# Altium PCB HEADBAND-PCB.PcbDoc
Units mil, origin at the board's own origin, x right, y up, seen from the top; angles counter-clockwise.
Board outline 2030 x 1240 mil, 2 copper layers (Top Layer, Bottom Layer); 69 components, 57 nets, 217 pads, 108 vias.
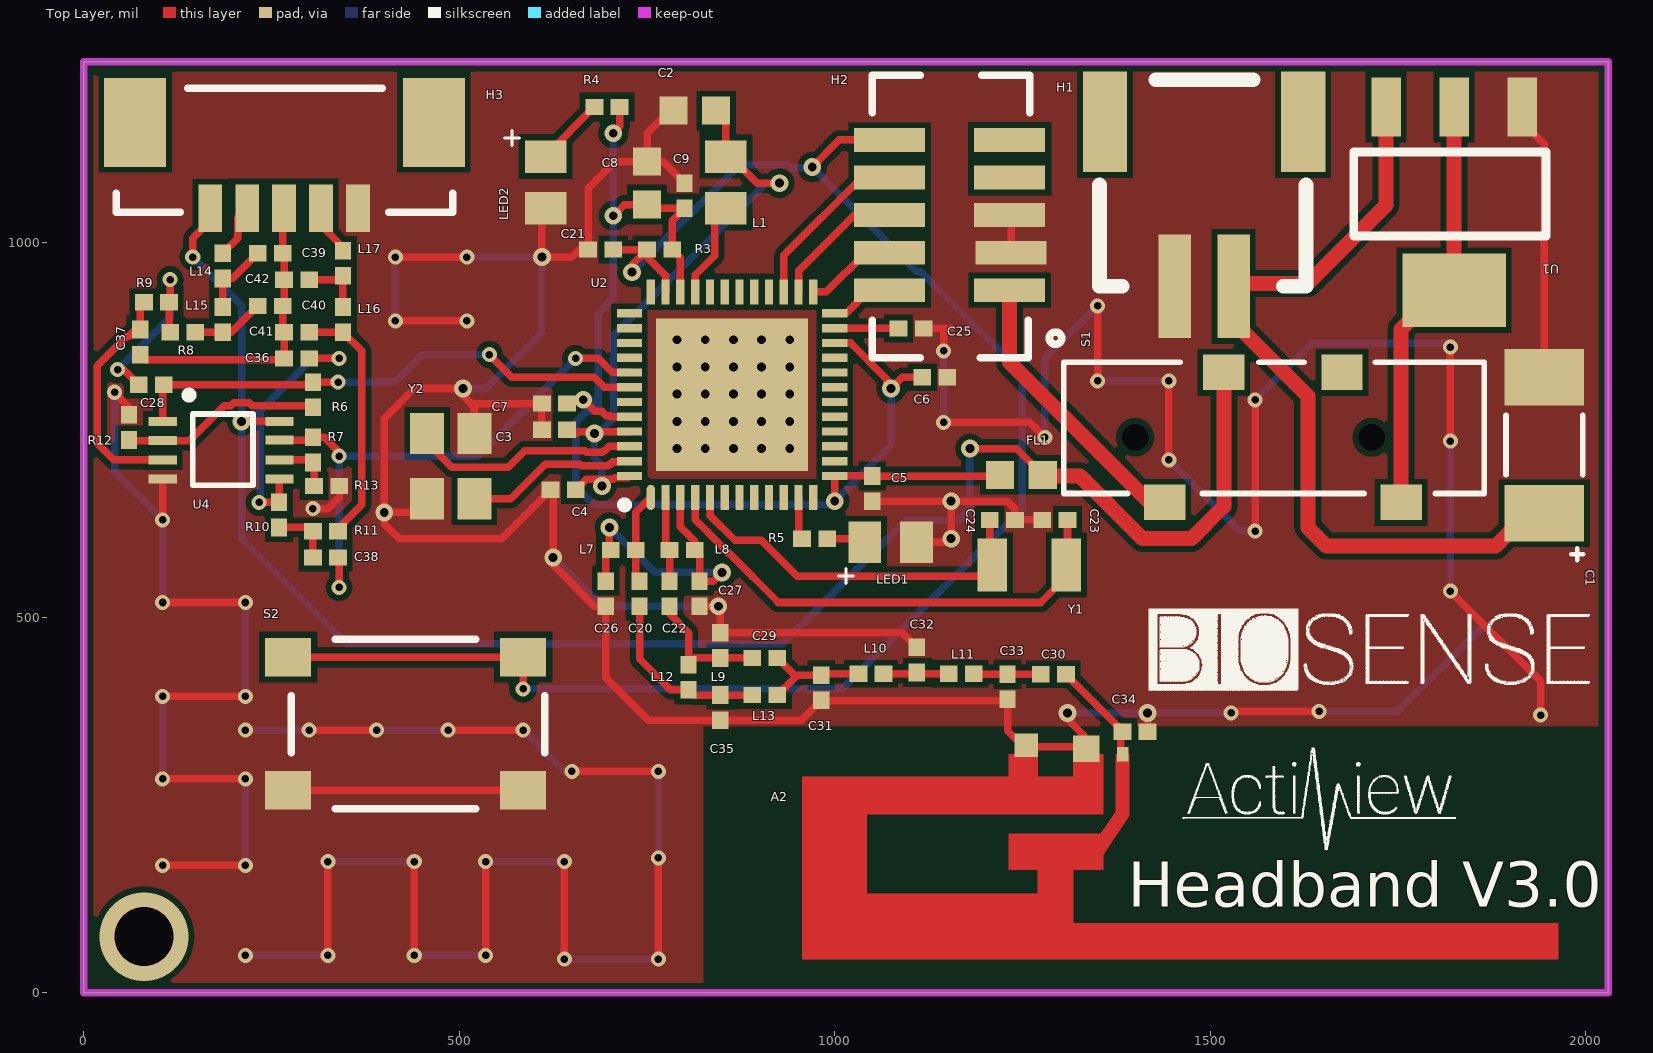
[diagram p0: Top Layer view]
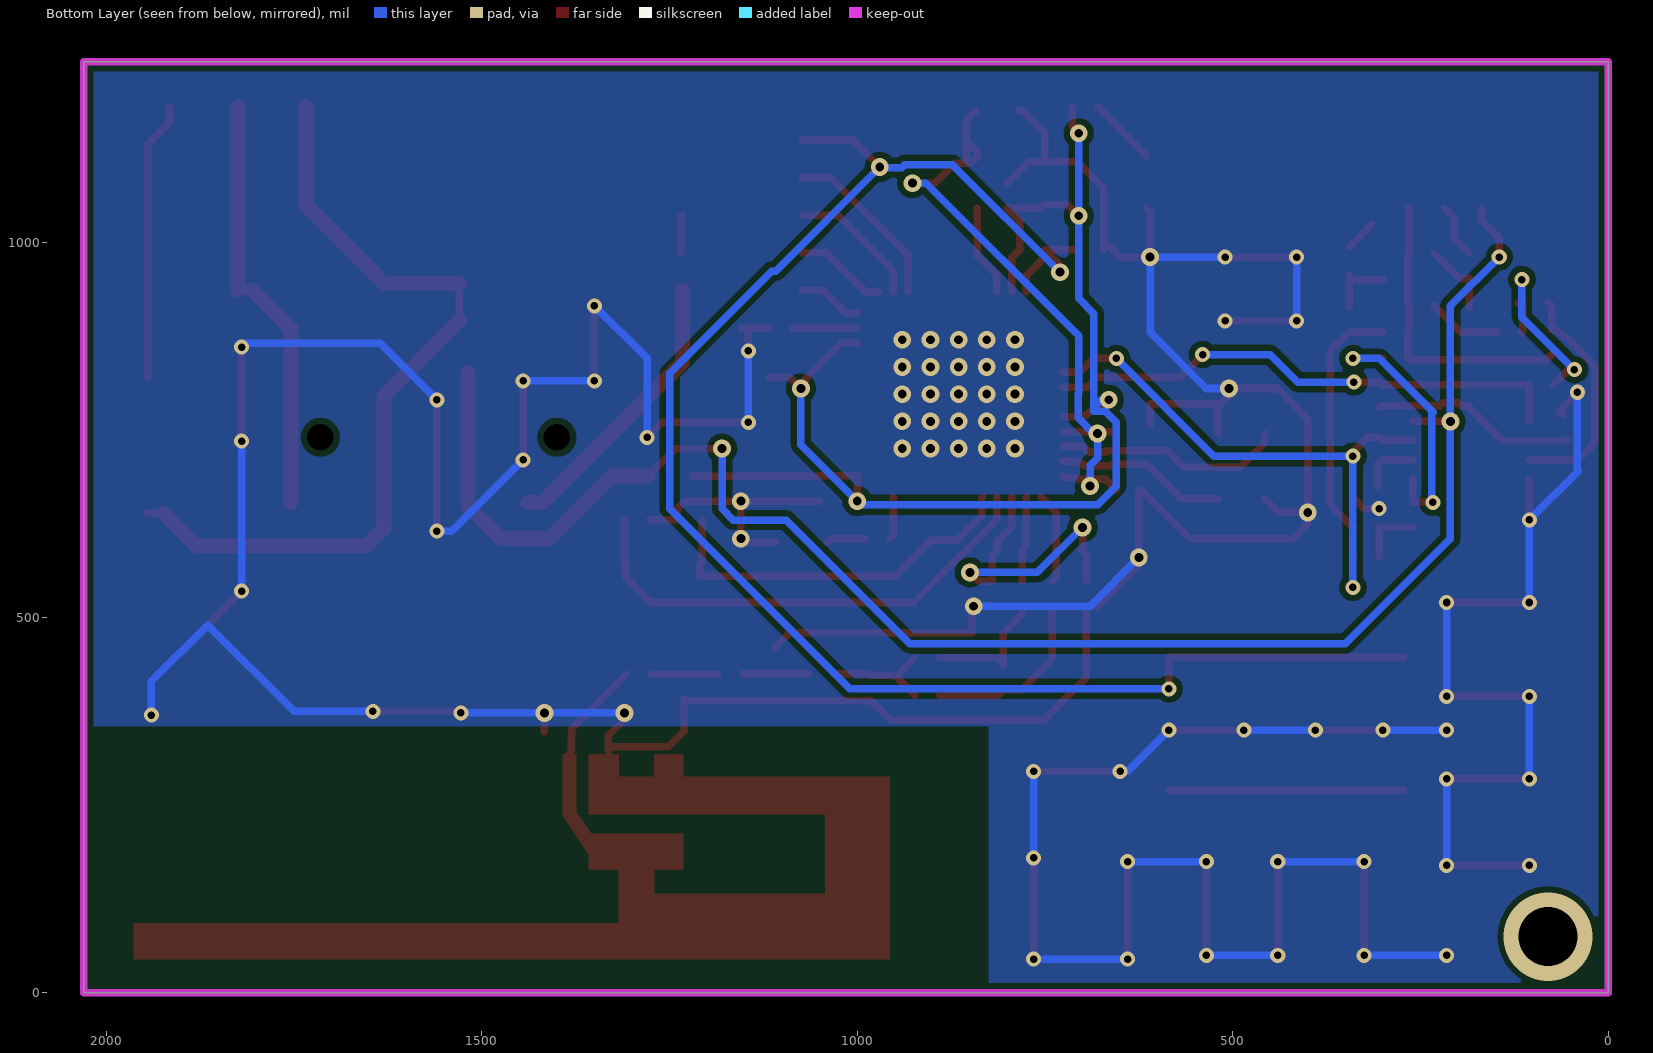
[diagram p1: Bottom Layer view, seen from below]

## Layer stack, top to bottom
Top Solder: solder mask 0.4, Solder Resist, Dk 3.5
Top Layer: signal copper 1.4
Dielectric 1: dielectric 12.6, FR-4, Dk 4.8
Bottom Layer: signal copper 1.4
Bottom Solder: solder mask 0.4, Solder Resist, Dk 3.5

## Board outline
0,0 2030,0 2030,1240 0,1240

## Design rules (kind name [scope] priority, off if disabled: settings)
Clearance [All] p1: gap=8 ignorepadtopadclearanceinfootprint=TRUE
ComponentClearance [All] p1: gap=0 collisioncheckmode=3 verticalgap=0 showdistances=FALSE
HoleSize [All] p1: absolutevalues=TRUE maxlimit=787.4 minlimit=7.87 maxpercent=80.000 minpercent=20.000
MinimumAnnularRing [All] p1: minimumring=5
MinimumSolderMaskSliver [All] p1: minsoldermaskwidth=0.79
PolygonConnect [All] p1: connectstyle=Direct reliefconductorwidth=10 reliefentries=4 polygonreliefangle="90 Angle" airgapwidth=10
RoutingVias [All] p1: holewidth=10 width=20 viastyle="Through Hole" minholewidth=5 minwidth=20 maxholewidth=196.85 maxwidth=196.85
SilkToSolderMaskClearance [IsPad] p1: minsilkscreentomaskgap=1.97 clearancetoexposedcopper=TRUE
SolderMaskExpansion [All] p1: expansion=4
Width [All] p1: maxlimit=40 minlimit=10 preferedwidth=10 minimp=50.000000 maximp=50.000000 favimp=50.000000
26 further rules are at their usual default settings.

## Classes and differential pairs
component class S1: C1 C2 C3 C4 C5 C6 C7 C8 C9 C20 C21 C22 C23 C24 C25 C26 C27 C29 C30 C31 C32 C33 C34 C35 FL1 H1 L1 L7 L8 L9 L10 L11 L12 L13 LED1 LED2 R3 R4 R5 S2 U1 U2 Y1 Y2
component class S2: C28 C36 C37 C38 C39 C40 C41 C42 H3 L14 L15 L16 L17 R6 R7 R8 R9 R10 R11 R12 R13 U4

## Components (designator, comment, footprint, x,y, rotation, side; value= is the part's Value field where it differs from the comment)
A2 "ANTENNA_DN007" Inverted_F_Antenna 1350,110 r0 top
C1 "150uF" "2312 [IMP] Polar" 1945,820 r270 top
C2 "22uF" 0603[IMP] 842.09,1175 r180 top
C3 "100nF" 0402[IMP] 643.46,750 r180 top
C4 "100nF" 0402[IMP] 655,670 r180 top
C5 "100nF" 0402[IMP] 1050,688.46 r270 top
C6 "100nF" 0402[IMP] 1116.54,820 r0 top
C7 "100nF" 0402[IMP] 643.46,785 r180 top
C8 "22uF" 0603[IMP] 750,1050 r90 top
C9 "100nF" 0402[IMP] 800,1045 r90 top
C20 "12pF" 0402[IMP] 740,548.46 r270 top
C21 "100nF" 0402[IMP] 705,990 r180 top
C22 "12pF" 0402[IMP] 780,548.46 r270 top
C23 "12pF" 0402[IMP] 1310,630 r180 top
C24 "12pF" 0402[IMP] 1206.54,630 r0 top
C25 "1uF" 0402[IMP] 1085,885 r0 top
C26 "12pF" 0402[IMP] 695,548.46 r270 top
C27 "12pF" 0402[IMP] 820,548.46 r270 top
C28 "10nF" 0402[IMP] 106.54,810 r180 top
C29 "1pF" 0402[IMP] 890.11,446.21 r0 top
C30 "12pF" 0402[IMP] 1274.43,424.44 r0 top
C31 "DNI" 0402[IMP] 982.04,389.64 r90 top
C32 "3.6pF" 0402[IMP] 1109.32,426.89 r90 top
C33 "1pF" 0402[IMP] 1230.11,390.97 r90 top
C34 "1pF" 0402[IMP] 1416.69,347.87 r180 top
C35 "1pF" 0402[IMP] 847.69,396.72 r270 top
C36 "10nF" 0402[IMP] 300,845 r180 top
C37 "10nF" 0402[IMP] 75,883.46 r270 top
C38 "10nF" 0402[IMP] 338.46,580 r180 top
C39 "Cap" 0402[IMP] 265,985 r180 top value=DNI
C40 "Cap" 0402[IMP] 265,915 r180 top value=DNI
C41 "Cap" 0402[IMP] 266.54,880 r0 top value=DNI
C42 "Cap" 0402[IMP] 266.54,950 r0 top value=DNI
FL1 "BLM18HE152SN1" 0603[IMP] 1277.09,690 r180 top
H1 "Battery Header" S2B-PH-SM4-TB 1452.52,941.1 r0 top
H2 "JTAG" HDR-2*5-0.05_Without_Through_Hole 1160,1030 r270 top
H3 "Header 5" "Header 5  -MolexPicoBlade - RightAngle" 168.15,1045 r0 top
L1 "6.8uH" 0805[IMP] 855,1045 r90 top
L7 "10nH" 0402[IMP] 701.54,590 r0 top
L8 "10nH" 0402[IMP] 813.46,590 r180 top
L9 "2.2nH" 0402[IMP] 847.69,446.21 r90 top
L10 "1.5nH" 0402[IMP] 1031.54,425 r0 top
L11 "2.2nH" 0402[IMP] 1151.74,425 r0 top
L12 "DNI" 0402[IMP] 805.26,403.79 r90 top
L13 "2.2nH" 0402[IMP] 890.11,396.72 r0 top
L14 "Inductor" 0402[IMP] 185,985 r270 top value=DNI
L15 "Inductor" 0402[IMP] 185,913.46 r270 top value=DNI
L16 "Inductor" 0402[IMP] 345,880 r90 top value=DNI
L17 "Inductor" 0402[IMP] 345,955 r90 top value=DNI
LED1 "LEDG" "0805[IMP] - POLAR" 1040,600 r0 top value=?
LED2 "LEDR" "0805[IMP] - POLAR" 615,1113.9 r270 top value=?
R3 "100k" 0402[IMP] 750,990 r0 top
R4 "330" 0402[IMP] 680,1180 r0 top
R5 "330" 0402[IMP] 990,605 r180 top
R6 "25k" 0402[IMP] 305,780 r90 top
R7 "25k" 0402[IMP] 305,706.54 r90 top
R8 "300k" 0402[IMP] 148.46,880 r180 top
R9 "300k" 0402[IMP] 113.46,920 r180 top
R10 "300k" 0402[IMP] 260,620 r90 top
R11 "300k" 0402[IMP] 338.46,615 r180 top
R12 "1k" 0402[IMP] 60,770 r270 top
R13 "1k" 0402[IMP] 340,675 r180 top
S1 "SW-SP3T" CL-SB-13B 1715,740 r180 top
S2 "SW_TACT" PTS645SH50SMTR92_LFS 585,270 r180 top
U1 "1117-3.3" SOT-223 1915.55,1180 r180 top
U2 "IC_RF_CC13XX_7X7_QFN48_V2" "RGZ(S-PVQFN-N48) - duplicate" 755,660 r90 top
U4 "AD8629" MSOP-8 105,761.18 r270 top
Y1 "32.768kHz" FC-135 1308.43,570 r180 top
Y2 "24MHz" TSX-3225 520,658.39 r90 top

## Footprints (in the part's own frame and the unit in brackets; to place one, negate y for a bottom-side part, rotate by r counter-clockwise, add the part's x,y. Pads: shape width x height; smd on the part's side, far side on the other; paste and mask are expansions set on the pad)
0402[IMP] [mm]
  rect 0.6x0.55 smd: 1(0,0) 2(0.85,0)
0603[IMP] [mm]
  rect 0.95x0.95 smd: 1(0,0) 2(1.45,0)
0805[IMP] [mm]
  rect 1.1x1.4 smd: 1(0,0) 2(1.75,0)
"0805[IMP] - POLAR" [mm]
  rect 1.1x1.4 smd: 1(0,0) 2(1.75,0)
  silkscreen extent -0.89,-1.4 -0.38,-0.89
"2312 [IMP] Polar" [mm]
  rect 1.9x2.7 smd: 1(0,0) 2(4.6,0)
  silkscreen extent 1.3,-1.3 6.2,1.32
CL-SB-13B [mm] "Three pos switch"
  round 0.1 hole 0.9: 0(0,0) 0(8,0)
  rect 1.4x1.2 smd: 1(-1,2.2) 2(1,-2.2) 3(5,-2.2) 4(7,2.2)
  silkscreen extent -3.81,-2.54 10.41,1.91
FC-135 [mm]
  rect 1x1.8 smd: 1(0,0) 2(2.5,0)
HDR-2*5-0.05_Without_Through_Hole [mm]
  rect 0.8x2.4 smd: 1(2.388,1.854) 2(2.388,-2.21) 3(1.118,1.905) 4(1.118,-2.21) 5(-0.152,1.854) 6(-0.152,-2.21) 7(-1.422,1.854) 8(-1.422,-2.21) 9(-2.692,1.854) 10(-2.692,-2.21)
  silkscreen extent -4.88,-2.79 4.67,3.61
"Header 5  -MolexPicoBlade - RightAngle" [mm]
  rect 2.1x3 smd: 0(-2.54,2.9) 0(7.569,2.9)
  rect 0.8x1.6 smd: 1(0,0) 2(1.25,0) 3(2.5,0) 4(3.75,0) 5(5,0)
  silkscreen extent -3.17,-0.13 8.2,4.06
Inverted_F_Antenna [mil]
  rect 15.75x19.68 smd: 1(33.5,208)
  rect 35.43x35.43 smd: 2(-15,215)
  rect 31.5x31.5 smd: 3(-95,220)
  Top Layer region: -393.5,178 -393.5,-65 613.5,-65 613.5,-17 -32.5,-17 -32.5,54 7.5,54 7.5,74 42.5,126 42.5,208 24.5,208 24.5,131 4.5,102 -118.5,102 -118.5,54 -79.5,54 -79.5,22 -307.5,22 -307.5,128 7.5,128 7.5,208 -32.5,208 -32.5,178 -79.5,178 -79.5,208 -118.5,208 -118.5,178 -393.5,178
MSOP-8 [mm]
  rect 0.3x0.95 smd: 1(0,0) 2(0.65,0) 3(1.3,0) 4(1.95,0) 5(1.95,3.95) 6(1.3,3.95) 7(0.635,3.95) 8(0,3.95)
  silkscreen extent -1.02,0.76 2.16,3.05
PTS645SH50SMTR92_LFS [mm] "Tactile switch"
  rect 1.55x1.3 smd: 1(0,0) 1(7.95,0) 2(0,-4.5) 2(7.95,-4.5)
  silkscreen extent -0.74,-5.11 7.85,0.64
"RGZ(S-PVQFN-N48) - duplicate" [mm]
  oval 0.85x0.28 smd mask+0.07: 1(0,0)
  rect 0.85x0.28 smd mask+0.07: 2(0,-0.5) 3(0,-1) 4(0,-1.5) 5(0,-2) 6(0,-2.5) 7(0,-3) 8(0,-3.5) 9(0,-4) 10(0,-4.5) 11(0,-5) 12(0,-5.5) 25(6.95,-5.5) 26(6.95,-5) 27(6.95,-4.5) 28(6.95,-4) 29(6.95,-3.5) 30(6.95,-3) 31(6.95,-2.5) 32(6.95,-2) 33(6.95,-1.5) 34(6.95,-1) 35(6.95,-0.5) 36(6.95,0)
  rect 0.28x0.85 smd mask+0.07: 13(0.725,-6.225) 14(1.225,-6.225) 15(1.725,-6.225) 16(2.225,-6.225) 17(2.725,-6.225) 18(3.225,-6.225) 19(3.725,-6.225) 20(4.225,-6.225) 21(4.725,-6.225) 22(5.225,-6.225) 23(5.725,-6.225) 24(6.225,-6.225) 37(6.225,0.725) 38(5.725,0.725) 39(5.225,0.725) 40(4.725,0.725) 41(4.225,0.725) 42(3.725,0.725) 43(3.225,0.725) 44(2.725,0.725) 45(2.225,0.725) 46(1.725,0.725) 47(1.225,0.725) 48(0.725,0.725)
  rect 5.15x5.15 smd mask+0.07: 49(3.475,-2.75)
  silkscreen extent -0.38,0.76 -0.13,1.02
S2B-PH-SM4-TB [mm] "S2B-PH-SM$-TB"
  rect 1.5x3.4 smd: 0(-2.35,5.56) 0(4.35,5.56)
  rect 1.1x3.5 smd: 1(2,0) 2(0,0)
  silkscreen extent -2.54,0 4.44,6.98
SOT-223 [mm]
  rect 1x2 smd: 1(0,0) 2(2.3,0) 3(4.6,0)
  rect 3.5x2.5 smd: 2(2.3,6.2)
  silkscreen extent -0.8,1.52 5.7,4.37
TSX-3225 [mm]
  rect 1.4x1.15 smd: 1(0,0) 2(2.2,0) 3(2.2,1.6) 4(0,1.6)

## Part data
C1: library part Cap_E, "Capacitor", Supplier Part Number 1=478-3481-1-ND, Supplier 1=Digi-Key
C2 C8: library part CAPACITOR, Current=CIMAX, MAX_TEMP=CTMAX, PSpiceTemplate="C^@REFDES %1 %2 ?TOLERANCE|C^@REFDES| @VALUE ?IC/IC=@IC/ TC=@TC1,@TC2 ?TOLERANCE|\n.model C^@REFDES CAP C=1 DEV=@TOLERANCE%|", Supplier Part Number 1=490-7611-1-ND, VOLTAGE=CMAX, CLASS=DISCRETE, DIST=FLAT, KNEE=CBMAX, SLOPE=CSMAX, Supplier 1=Digi-Key, TC1=0, TC2=0
C3 C4 C5 C6 C7 C9 C21: library part CAPACITOR, Current=CIMAX, MAX_TEMP=CTMAX, PSpiceTemplate="C^@REFDES %1 %2 ?TOLERANCE|C^@REFDES| @VALUE ?IC/IC=@IC/ TC=@TC1,@TC2 ?TOLERANCE|\n.model C^@REFDES CAP C=1 DEV=@TOLERANCE%|", Supplier Part Number 1=490-6327-1-ND, VOLTAGE=CMAX, CLASS=DISCRETE, DIST=FLAT, KNEE=CBMAX, SLOPE=CSMAX, Supplier 1=Digi-Key, TC1=0, TC2=0
C20 C22 C23 C24 C26 C27: library part CAPACITOR, Current=CIMAX, MAX_TEMP=CTMAX, PSpiceTemplate="C^@REFDES %1 %2 ?TOLERANCE|C^@REFDES| @VALUE ?IC/IC=@IC/ TC=@TC1,@TC2 ?TOLERANCE|\n.model C^@REFDES CAP C=1 DEV=@TOLERANCE%|", Supplier Part Number 1=399-1013-1-ND, VOLTAGE=CMAX, CLASS=DISCRETE, DIST=FLAT, KNEE=CBMAX, SLOPE=CSMAX, Supplier 1=Digi-Key, TC1=0, TC2=0
C25: library part CAPACITOR, Current=CIMAX, MAX_TEMP=CTMAX, PSpiceTemplate="C^@REFDES %1 %2 ?TOLERANCE|C^@REFDES| @VALUE ?IC/IC=@IC/ TC=@TC1,@TC2 ?TOLERANCE|\n.model C^@REFDES CAP C=1 DEV=@TOLERANCE%|", Supplier Part Number 1=1276-1448-1-ND, VOLTAGE=CMAX, CLASS=DISCRETE, DIST=FLAT, KNEE=CBMAX, SLOPE=CSMAX, Supplier 1=Digi-Key, TC1=0, TC2=0
C28 C31 C37: library part CAPACITOR, Current=CIMAX, MAX_TEMP=CTMAX, PSpiceTemplate="C^@REFDES %1 %2 ?TOLERANCE|C^@REFDES| @VALUE ?IC/IC=@IC/ TC=@TC1,@TC2 ?TOLERANCE|\n.model C^@REFDES CAP C=1 DEV=@TOLERANCE%|", VOLTAGE=CMAX, CLASS=DISCRETE, DIST=FLAT, KNEE=CBMAX, SLOPE=CSMAX, TC1=0, TC2=0
C29 C33 C34 C35: library part CAPACITOR, Current=CIMAX, MAX_TEMP=CTMAX, PSpiceTemplate="C^@REFDES %1 %2 ?TOLERANCE|C^@REFDES| @VALUE ?IC/IC=@IC/ TC=@TC1,@TC2 ?TOLERANCE|\n.model C^@REFDES CAP C=1 DEV=@TOLERANCE%|", Supplier Part Number 1=490-3199-1-ND, VOLTAGE=CMAX, CLASS=DISCRETE, DIST=FLAT, KNEE=CBMAX, SLOPE=CSMAX, Supplier 1=Digi-Key, TC1=0, TC2=0
C30: library part CAPACITOR, Current=CIMAX, MAX_TEMP=CTMAX, PSpiceTemplate="C^@REFDES %1 %2 ?TOLERANCE|C^@REFDES| @VALUE ?IC/IC=@IC/ TC=@TC1,@TC2 ?TOLERANCE|\n.model C^@REFDES CAP C=1 DEV=@TOLERANCE%|", Supplier Part Number 1=490-5924-1-ND, VOLTAGE=CMAX, CLASS=DISCRETE, DIST=FLAT, KNEE=CBMAX, SLOPE=CSMAX, Supplier 1=Digi-Key, TC1=0, TC2=0
C32: library part CAPACITOR, Current=CIMAX, MAX_TEMP=CTMAX, PSpiceTemplate="C^@REFDES %1 %2 ?TOLERANCE|C^@REFDES| @VALUE ?IC/IC=@IC/ TC=@TC1,@TC2 ?TOLERANCE|\n.model C^@REFDES CAP C=1 DEV=@TOLERANCE%|", Supplier Part Number 1=490-5939-1-ND, VOLTAGE=CMAX, CLASS=DISCRETE, DIST=FLAT, KNEE=CBMAX, SLOPE=CSMAX, Supplier 1=Digi-Key, TC1=0, TC2=0
C36 C38: library part CAPACITOR, Current=CIMAX, MAX_TEMP=CTMAX, PSpiceTemplate="C^@REFDES %1 %2 ?TOLERANCE|C^@REFDES| @VALUE ?IC/IC=@IC/ TC=@TC1,@TC2 ?TOLERANCE|\n.model C^@REFDES CAP C=1 DEV=@TOLERANCE%|", Supplier Part Number 1=478-10127-1-ND, VOLTAGE=CMAX, CLASS=DISCRETE, DIST=FLAT, KNEE=CBMAX, SLOPE=CSMAX, Supplier 1=Digi-Key, TC1=0, TC2=0
C39 C40 C41 C42: "Capacitor", LatestRevisionDate=17-Jul-2002, LatestRevisionNote="Re-released for DXP Platform.", PackageDescription="Radial Cap, Thru-Hole; 2 Leads; 0.3 in Pin Spacing", PackageReference=RAD-0.3, Published=8-Jun-2000, Publisher="Altium Limited"
FL1: library part INDUCTOR, Current=LMAX, DIELECTRIC=DSMAX, PSpiceTemplate="L^@REFDES %1 %2 ?TOLERANCE|L^@REFDES| @VALUE ?IC/IC=@IC/ ?TOLERANCE|\n.model l^@REFDES IND L=1 DEV=@TOLERANCE%|", Supplier Part Number 1=490-5216-1-ND, DIST=FLAT, Supplier 1=Digi-Key
H1: library part "Header 2", Supplier Part Number 1=455-1749-1-ND, Supplier 1=Digi-Key
H2: library part JTAG-ARM, "USB JTAG Programmer", Supplier Part Number 1=SAM13160CT-ND, Supplier 1=Digi-Key
H3: Supplier Part Number 1=WM7623CT-ND, Supplier 1=Digi-Key
L1: library part INDUCTOR, Current=LMAX, DIELECTRIC=DSMAX, PSpiceTemplate="L^@REFDES %1 %2 ?TOLERANCE|L^@REFDES| @VALUE ?IC/IC=@IC/ ?TOLERANCE|\n.model l^@REFDES IND L=1 DEV=@TOLERANCE%|", Supplier Part Number 1=445-6761-1-ND, DIST=FLAT, Supplier 1=Digi-Key
L7 L8: library part INDUCTOR, Current=LMAX, DIELECTRIC=DSMAX, PSpiceTemplate="L^@REFDES %1 %2 ?TOLERANCE|L^@REFDES| @VALUE ?IC/IC=@IC/ ?TOLERANCE|\n.model l^@REFDES IND L=1 DEV=@TOLERANCE%|", Supplier Part Number 1=712-1407-1-ND, DIST=FLAT, Supplier 1=Digi-Key
L9 L11 L13: library part INDUCTOR, Current=LMAX, DIELECTRIC=DSMAX, PSpiceTemplate="L^@REFDES %1 %2 ?TOLERANCE|L^@REFDES| @VALUE ?IC/IC=@IC/ ?TOLERANCE|\n.model l^@REFDES IND L=1 DEV=@TOLERANCE%|", Supplier Part Number 1=490-6794-1-ND, DIST=FLAT, Supplier 1=Digi-Key
L10: library part INDUCTOR, Current=LMAX, DIELECTRIC=DSMAX, PSpiceTemplate="L^@REFDES %1 %2 ?TOLERANCE|L^@REFDES| @VALUE ?IC/IC=@IC/ ?TOLERANCE|\n.model l^@REFDES IND L=1 DEV=@TOLERANCE%|", Supplier Part Number 1=490-6783-1-ND, DIST=FLAT, Supplier 1=Digi-Key
L12: library part INDUCTOR, Current=LMAX, DIELECTRIC=DSMAX, PSpiceTemplate="L^@REFDES %1 %2 ?TOLERANCE|L^@REFDES| @VALUE ?IC/IC=@IC/ ?TOLERANCE|\n.model l^@REFDES IND L=1 DEV=@TOLERANCE%|", DIST=FLAT
LED1: library part LED_G, "LED", Supplier 1=Digi-Key, Supplier 2=Digi-Key, Supplier Part Number 2=475-1410-1-ND
LED2: library part LED_R, "LED", Supplier Part Number 1=475-1278-1-ND, Supplier 1=Digi-Key
R3: library part RESISTOR, Supplier Part Number 1=541-100KYACT-ND, Supplier 1=Digi-Key
R4 R5: library part RESISTOR, Supplier Part Number 1=P330LCT-ND, Supplier 1=Digi-Key
R6 R7 R10 R11 R12 R13: library part RESISTOR
R8: library part RESISTOR, Supplier Part Number 1=311-180JRCT-ND, Supplier 1=Digi-Key
R9: library part RESISTOR, Supplier Part Number 1=541-5.23MLCT-ND, Supplier 1=Digi-Key
S2: "Tactile switch", Supplier Part Number 1=CKN9085CT-ND, Supplier 1=Digi-Key
U1: library part 1117-3.3V, "3.3V Voltage Regulator", Supplier Part Number 1=LM1117IMPX-3.3/NOPBCT-ND, Supplier 1=Digi-Key
U2: Supplier Part Number 1=296-44716-1-ND, Design_Date=2014-09-04, Designed_By="Artur Bielinski", SPLIT_INST=TRUE, Supplier 1=Digi-Key, SWAP_INFO=(S1+S2)
U4: Supplier Part Number 1=AD8629ARMZ-ND, Supplier 1=Digi-Key
Y1: library part CRYSTAL, Supplier Part Number 1=SER4089CT-ND, Supplier 1=Digi-Key
Y2: library part XTAL_4PIN_S, Supplier Part Number 1=SER3635CT-ND, Supplier 1=Digi-Key
A2: Design date=2011-09-19, Designed by="Artur Bielinski"
L14 L15 L16 L17: Code_IEC=1005, Code_JEITA=0402, LatestRevisionDate=29-May-2009, LatestRevisionNote="IPC-7351 Footprint Added.", PackageDescription="Chip Inductor", PackageReference=0402-A, Published=8-Jun-2000, Publisher="Altium Limited"

## Via types
v1: diameter 20, hole 10, Top Layer to Bottom Layer, 59 vias
v2: diameter 23.62, hole 11.81, Top Layer to Bottom Layer, 48 vias
v3: diameter 118.11, hole 78.4, Top Layer to Bottom Layer, 1 vias

## Nets (pads, with @x,y where several pads share a name; then routed paths per layer and width w, separated by ;. In a path a pad name is that pad's centre, name@x,y a point inside that pad or via, vN(x,y) a via of type N, cw(c..) or ccw(c..) an arc to the next point about the centre after c; other vN are vias at no path point)
CC1350_SW_PWR: U2.43
CC1350_VDD: FL1.1 H3.1 S1.3 U4.8 | length 2293.9
  Top Layer w10: v1(145,980) 145,1005 168.15,1028.15 H3.1 ; v2(210,761.18) U4.8 ; v2(1180,725) 1242.09,725 FL1.1 FL1.1@1278.62,688.46
  Top Layer w20: FL1.1@1278.62,688.46 1326.54,688.46 1410,605 1475.12,605 1518.15,648.03 S1.3
  Bottom Layer w10: v1(145,980) 210,915 v2(210,761.18) 210,605 350,465 930,465 1094.81,629.81 1164.9,629.81 1180,644.91 v2(1180,725)
DCDC_SW: L1.1 U2.33 | length 122.1
  Top Layer w10: U2.33 814.06,956.18 840,982.13 L1.1@840,1045
ElectrodeA: H3.2 L14.1 | length 73.4
  Top Layer w10: L14.1 205,1005 205,1032.64 H3.2
ElectrodeB: H3.4 L17.2 | length 42.9
  Top Layer w10: H3.4@314.64,1023.83 L17.2@345,993.46
ElectrodeGND: C36.2 C37.2 C39.1 C40.1 C41.1 C42.1 H3.3 | length 397.7
  Top Layer w10: C37.2 81.54,843.46 265,843.46 C36.2 C41.1 265,881.54 C40.1 266.54,916.54 C42.1 266.54,984.32 C39.1@265.43,985.43 ; C39.1 265,1043.43 H3.3
GND: A2.2 A2.3 C1.1 C2.2 C3.2 C4.2 C5.2 C6.2 C7.2 C8.2 C9.2 C21.2 C23.2 C24.2 C25.2 C26.2 C27.2 C31.1 C32.2 C33.1 C34.1 C35.2 H1.2 H2.3 H2.5 H3.5 L9.2 LED1.2 LED2.2 R12.1 R13.1 S2.1 U1.1 U2.49 U4.4 Y2.2 Y2.4 | length 10446.9
  Top Layer w10: v1(41,800) 41,799 65,775 R12.1 ; v1(105,170) v1(215,170) ; v1(105,285) v1(215,285) ; v1(105,395) v1(215,395) ; v1(105,520) v1(215,520) ; v1(105,630) U4.4 ; S2.1@272.01,270 S2.1@585,270 ; v1(300,350) v1(390,350) ; v1(305,645) 325,645 340,660 R13.1 ; v1(325,50) v1(325,175) ; v1(415,895) v1(510,895) ; v1(415,980) v1(510,980) ; v1(440,50) v1(440,175) ; Y2.4 438.62,640 v2(400,640) ; v1(485,350) v1(585,350) ; v2(505,805) v2@495.39,805 ; Y2.2 520,780 515,785 ; v1(535,50) v1(535,175) ; C3.2@610,756.54 C7.2 515,785 ; LED2.2 610,1040 v2(610,980) 650,980 665.77,995.77 C21.2 671.54,1071.54 707.09,1107.09 C8.2 ; v1(640,45) v1(640,175) ; v1(650,295) v1(765,295) ; v1(765,45) v1(765,180) ; C2.2 780,1175 750,1145 C8.2 ; C9.2 771.38,1107.09 C8.2 ; C27.2 v2(845,515) 847.69,512.31 L9.2 1089.99,479.68 C32.2 ; C31.1 955.64,363.25 C35.2 751.75,363.25 695,420 C26.2 680,515 625,570 v2(625,580) 625,666.54 C4.2 556.54,605 420,605 400,625 v2(400,640) ; C31.1@982.63,389.08 C33.1@1228.22,389.08 ; C5.2 v2(1155,655) ; LED1.2 1150,600 v2(1155,605) v2(1155,655) ; C25.2 1145,885 ; v1(1145,760) 1260,760 v1(1280,740) ; v1(1145,855) 1145,885 ; 1154.61,885 1145,885 ; C33.1 1230.11,349.44 A2.3@1251.69,327.87 ; H2.5 1235,1034 H2.3 ; A2.3@1257.13,327.87 1326.69,327.87 1331.69,322.87 1331.69,342.87 1310,364.56 v2(1310,372.87) ; C23.2 C24.2 1240,645 1230,655 v2(1155,655) ; v1(1350,815) v1(1350,915) ; C34.1 v2(1416.69,372.87) ; v1(1445,710) v1(1445,815) ; v1(1527.87,372.87) 1530,375 v1(1645,375) ; v1(1560,615) v1(1560,790) ; v1(1820,535) 1940,415 v1(1940,370) ; v1(1820,735) v1(1820,860) ; U1.1 1915.55,1159.45 1945,1130 C1.1 ; v2(400,640) 400,765 440,805 v2@495.39,805 ; v2@495.39,805 515,785.39 515,785
  Bottom Layer w10: v1(41,800) 41,696 40,695 v1(105,630) v1(105,520) ; v1(105,285) v1(105,395) ; v1(215,50) v1(325,50) ; v1(215,170) v1(215,285) ; v1(215,350) v1(300,350) ; v1(215,395) v1(215,520) ; v1(325,175) v1(440,175) ; v1(390,350) v1(485,350) ; v1(415,895) v1(415,980) ; v1(440,50) v1(535,50) ; v2(505,805) 535,805 610,880 v2(610,980) v1(510,980) ; v1(535,175) v1(640,175) ; v1(585,350) 640,295 v1(650,295) ; v2(625,580) 690,515 v2(845,515) ; v1(640,45) v1(765,45) ; v1(765,180) v1(765,295) ; v1(1145,760) v1(1145,855) ; v1(1280,740) 1280,845 v1(1350,915) ; v2(1310,372.87) v2(1416.69,372.87) v1(1527.87,372.87) ; v1(1350,815) v1(1445,815) ; v1(1445,710) 1540,615 v1(1560,615) ; v1(1560,790) 1635,865 1815,865 v1(1820,860) ; v1(1645,375) 1750,375 1865,490 1940,415 v1(1940,370) ; v1(1820,535) v1(1820,735)
  other v2: 790,725 827.5,725 865,725 902.5,725 940,725 790,761.25 827.5,761.25 865,761.25 902.5,761.25 940,761.25 790,797.5 827.5,797.5 865,797.5 902.5,797.5 940,797.5 790,833.75 827.5,833.75 865,833.75 902.5,833.75 940,833.75 790,870 827.5,870 865,870 902.5,870 940,870
JTAG_TCK: H2.4 U2.25 | length 123.2
  Top Layer w10: U2.25 988.62,933.62 1041,986 H2.4
JTAG_TDI: H2.8 U2.27 | length 232.4
  Top Layer w10: U2.27 932.16,982.16 1036,1086 H2.8
JTAG_TDO: H2.6 U2.26 | length 180.1
  Top Layer w10: U2.26 951.85,961.85 1026,1036 H2.6
JTAG_TMS: H2.2 U2.24 | length 85.7
  Top Layer w10: U2.24 1015.08,905.08 1046,936 H2.2
NetA1_1: 
NetA2_1: A2.1 C30.2 C34.2 | length 137.8
  Top Layer w10: C30.2 1380.19,352.14 1380.19,344.83 1380.63,344.4 1380.63,320.87 A2.1
NetC1_2: C1.2 H1.1 U1.3 | length 1088.2
  Top Layer w10: H1.1@1530,895 H1.1@1530,945 ; C1.2@1923.9,638.9 C1.2
  Top Layer w20: H1.1@1530,895 1630,795 1630,620 1655,595 1880,595 C1.2@1923.9,638.9 ; H1.1@1530,945 1630,945 1734.45,1049.45 U1.3
NetC10_2: 
NetC12_1: 
NetC12_2: 
NetC14_1: 
NetC15_1: 
NetC18_1: 
NetC20_1: C20.1 L7.2 U2.1 | length 121.9
  Top Layer w10: C20.1 735,553.46 L7.2 735,640 U2.1
NetC20_2: 
NetC21_1: C21.1 H2.10 R3.1 S2.2 U2.35 | length 2262.9
  Top Layer w10: S2.2@272.01,447.17 585,447.17 v1(585,405) ; C21.1 R3.1 ; v2(730,960) 730,970 R3.1 ; U2.35 774.69,955.32 750,980 R3.1 ; v2(970,1100) 1006,1136 H2.10
  Bottom Layer w10: v1(585,405) 1010,405 1250,645 1250,825.48 1114.04,961.44 1108.56,961.44 v2(970,1100) 969.28,1099.28 940.81,1099.28 936.81,1103.28 873.28,1103.28 v2(730,960)
NetC22_1: C22.1 L8.2 U2.2 | length 113.7
  Top Layer w10: U2.2 774.69,595.32 L8.2 C22.1
NetC22_2: 
NetC23_1: C23.1 U2.4 Y1.1 | length 660.4
  Top Layer w10: U2.4 814.06,630.49 830.66,613.88 830.66,613.83 838.28,606.21 838.33,606.21 859.73,584.81 860.28,584.81 925.09,520 1274.43,520 1308.43,553.99 Y1.1 1310,571.57 C23.1
NetC24_1: C24.1 U2.5 Y1.2 | length 510.3
  Top Layer w10: U2.5 834.01,659.73 834.01,636.53 833.74,636.26 867.19,602.81 902.19,602.81 950,555 1210,555 Y1.2 1206.54,573.46 C24.1
NetC25_1: C25.1 U2.23 | length 85.1
  Top Layer w10: U2.23 1000.47,885 C25.1
NetC26_1: C26.1 C27.1 L7.1 L8.1 U2.3 | length 406.7
  Top Layer w10: C26.1 695,583.46 L7.1 700,591.54 v2(700,620) ; U2.3 794.37,620.63 813.46,601.54 L8.1 820,583.46 C27.1 838.46,548.46 v2(850,560)
  Bottom Layer w10: v2(700,620) 760,560 v2(850,560)
NetC28_1: C28.1 R6.2 U2.42 U4.1 | length 703.9
  Top Layer w10: U4.1 105,808.46 C28.1 301.54,810 R6.2 v1(338.46,813.46) ; v1(540,850) 570,820 680,820 693.35,806.65 U2.42
  Bottom Layer w10: v1(338.46,813.46) 413.46,813.46 450,850 v1(540,850)
NetC28_2: C28.2 R8.2 R9.1 | length 259.6
  Top Layer w10: v1(45,830) 53.07,830 C28.2 ; R9.1 113.46,881.54 R8.2 ; v1(115,950) 115,923.46 R9.1@120,918.46
  Bottom Layer w10: v1(45,830) 115,900 v1(115,950)
NetC29_1: C22.2 C29.1 L9.1 L12.2 | length 176.8
  Top Layer w10: C22.2 780,505 805.26,479.74 L12.2 814.22,446.21 L9.1 C29.1
NetC29_2: C29.2 C31.2 L10.1 L13.2 | length 155.6
  Top Layer w10: L13.2 949.97,423.11 ; C29.2 946.68,423.11 949.97,423.11 ; L10.1 983.93,425 C31.2 949.97,423.11
NetC30_1: C30.1 C33.2 L11.2 | length 88.6
  Top Layer w10: L11.2@1185.8,424.44 C33.2 C30.1
NetC32_1: C32.1 L10.2 L11.1 | length 86.7
  Top Layer w10: L10.2 L11.1
NetC35_1: C20.2 C35.1 L12.1 L13.1 | length 240.1
  Top Layer w10: C20.2 740,445 781.21,403.79 L12.1 812.33,396.72 C35.1 L13.1
NetC36_1: C36.1 R10.2 U4.5 | length 355.2
  Top Layer w10: v1(233.46,653.46) R10.2 260,683.9 U4.5 ; C36.1 v1(340,845)
  Bottom Layer w10: v1(233.46,653.46) 234.81,654.81 234.81,771.46 233.13,773.13 305,845 v1(340,845)
NetC37_1: C37.1 R9.2 U4.3 | length 315.1
  Top Layer w10: R9.2 75,915 C37.1 68.46,883.46 59.81,874.81 57.28,874.81 18,835.53 18,732 40,710 U4.3
NetC38_1: C38.1 R7.2 U2.41 U4.7 | length 758
  Top Layer w10: U4.7 301.18,736.18 R7.2 320,740 340,720 v1(340,715) ; C38.1 340,578.46 v1(340,540) ; v1(655,845) 685,845 703.66,826.34 U2.41
  Bottom Layer w10: v1(340,540) v1(340,715) 525,715 v1(655,845)
NetC38_2: C38.2 R10.1 R11.2 | length 85
  Top Layer w10: R10.1 305,620 R11.2 C38.2
NetC39_2: C39.2 L14.2 L15.1 | length 98.5
  Top Layer w10: L15.1 L14.2 198.07,951.54 C39.2
NetC40_2: C40.2 L15.2 R8.1 | length 97.6
  Top Layer w10: R8.1 L15.2 196.54,880 C40.2
NetC41_2: C41.2 L16.1 R11.1 | length 329.3
  Top Layer w10: C41.2 L16.1 370,855 370,650 340,620 R11.1@338.46,620
NetC42_2: C42.2 L16.2 L17.1 | length 88.6
  Top Layer w10: C42.2 340,950 L17.1 L16.2
NetLED1_1: LED1.1 R5.1 | length 52.1
  Top Layer w10: R5.1 1035,605 LED1.1
NetLED2_1: LED2.1 R4.1 | length 93
  Top Layer w10: LED2.1 615,1115 R4.1
NetR1_1: 
NetR5_2: R5.2 U2.11 | length 56.9
  Top Layer w10: U2.11 951.85,609.69 R5.2
NetR6_1: R6.1 R12.2 U4.2 | length 273.8
  Top Layer w10: R12.2@55,736.54 55.94,735.59 U4.2 140.59,735.59 186.99,781.99 195.72,781.99 199.72,785.99 220.28,785.99 224.28,781.99 303.01,781.99 R6.1
NetR7_1: R7.1 R13.2 U4.6 | length 78.1
  Top Layer w10: U4.6 301.54,710 R7.1 306.54,705 R13.2
NetS1_1: S1.1 U1.2 | length 567.1
  Top Layer w10: U1.2@1805.91,935.91 U1.2@1825,935.91
  Top Layer w20: S1.1 1754.37,884.37 U1.2@1805.91,935.91 ; U1.2@1825,935.91 U1.2@1825,1180
NetU2_46: U2.46 Y2.3 | length 308.3
  Top Layer w10: Y2.3 457.01,732.99 490,700 565,700 587.16,722.16 667.75,722.16 669.72,720.19 690.28,720.19 692.25,722.16 693.99,722.16 699.74,727.91 U2.46
NetU2_47: U2.47 Y2.1 | length 228.7
  Top Layer w10: Y2.1 568.39,658.39 614.16,704.16 660.3,704.16 662.27,702.19 697.73,702.19 699.7,704.16 701.44,704.16 704.46,707.17 712.63,707.17 713.68,708.23 U2.47
RF_SW: U2.6
VDDR: C2.1 C3.1 C4.1 L1.2 U2.45 U2.48 | length 863.5
  Top Layer w10: C4.1 669.19,684.19 705.19,684.19 707.16,686.16 724.07,686.16 U2.48 ; C3.1@655,745 657.6,747.6 U2.45 ; C2.1 855,1162.09 L1.2 ; L1.2@850,1130 840,1120 840,1113.9 848.9,1105 870,1105 896.54,1078.46 v2(926.54,1078.46)
  Bottom Layer w10: v2(690,675) 690,703.01 680,713.01 v2(680,745) 685,745 705.81,765.81 705.81,798.62 705,799.43 705,875 908.46,1078.46 v2(926.54,1078.46)
VDDS: C5.1 C6.1 C7.1 C8.1 C9.1 FL1.2 R3.2 R4.2 U2.13 U2.22 U2.34 U2.44 | length 1790.6
  Top Layer w10: v2(665,790) 680.19,774.81 689.53,774.81 695.37,768.97 700.06,768.97 701.74,767.28 U2.44 ; v2(705,1035) 720,1050 C8.1 755,1045 C9.1 783.46,1028.46 R3.2 794.37,979.09 U2.34 ; 713.46,1154.17 R4.2 ; v2(1000,655) 1000.08,655.08 U2.13 1049.92,688.54 C5.1 1218.46,688.46 FL1.2 ; U2.22 1021.02,865.71 1069.41,817.32 1069.41,814.28 1075,808.69 v2(1075,805) 1090,820 C6.1
  Bottom Layer w10: v2(665,790) 675,790 684.81,780.19 ; v2(705,1145) v2(705,1035) 705,925 684.81,904.81 684.81,780.19 ; v2(1075,805) 1075,730 v2(1000,655) 995.19,650.19 679.72,650.19 655.19,674.72 655.19,760.28 669.72,774.81 684.81,774.81 684.62,775 684.81,775 684.81,780.19
XDS_VCC: H2.1 S1.4 | length 379.9
  Top Layer w20: H2.1 1233,839.61 1419.22,653.39 S1.4
pads on no net: H1.0 H2.7 H2.9 H3.0 S1.0 S1.2 U2.7 U2.8 U2.9 U2.10 U2.12 U2.14 U2.15 U2.16 U2.17 U2.18 U2.19 U2.20 U2.21 U2.28 U2.29 U2.30 U2.31 U2.32 U2.36 U2.37 U2.38 U2.39 U2.40
copper on no net: | length 4.6
  Top Layer w10: 1380,315 1380.19,315.19 1383.23,318.23
  other v3: 80,75

## Polygon pours and split planes (outlines as drawn)
GND on Bottom Layer "Bottom Layer - GND" (solid, remove dead copper, pour order 6): 0,1240 2030,1240 2030,355 825,355 825,0 0,0
GND on Top Layer "Top Layer - GND" (solid, remove dead copper, pour order 4): 0,1240 2030,1240 2030,355 825,355 825,0 0,0

## Keep-outs
Keep-Out Layer:
  the board outline again, w10

## Silkscreen, mask and mechanical layers (free items; w line width, h text height)
Top Overlay:
  drawing of 20 lines, arcs and shapes, not listed
  text "Headband V3.0" at 1390,115 h60

## Text inside footprints (layer, text, board x,y; h text height)
A2: Mechanical 20 "1" at 1322.8,311 h8 r180; Mechanical 20 "3" at 1189.8,311 h8 r180; Mechanical 20 "2" at 1276.8,311 h8 r180